# EAGLE board AS5040_Cuadrature (EAGLE 7.2.0)
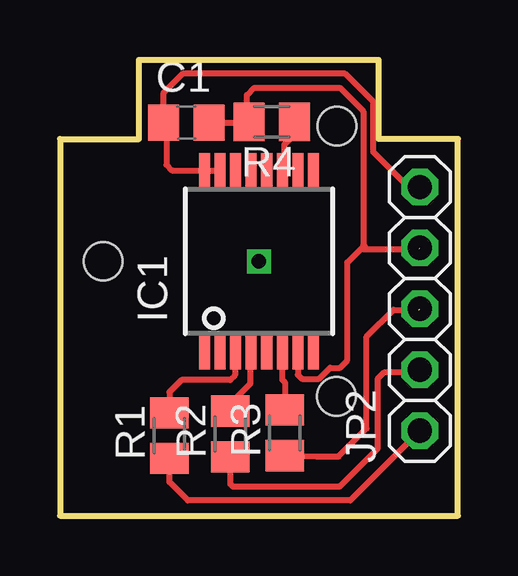
[diagram p0: board, top side]

Size 16.6 x 19 mm. Coordinates in mm from the lower left corner, seen from the top.
Outline: 0,15.7 3.3,15.7 3.3,19 13.3,19 13.3,15.7 16.6,15.7 16.6,0 0,0 0,15.7
Copper layers (1*16): Top 0.035mm / dielectric 1.5mm / Bottom 0.035mm
Design rules "default": minimum track width 10mil, minimum drill 24mil, track to track 8mil, track to pad 8mil, pad to pad 8mil, via to via 8mil, smd to smd 8mil, copper to edge 40mil, drill to drill 8mil, minimum pad ring 10mil, minimum via ring 8mil, stop-mask expansion 4mil, vias tented up to drill 0mil, thermal gap 10mil
Holes 1.6 mm at 1.8,10.61 11.56,16.24 11.54,4.97

## Footprints (pad centres in the part's own frame; a part is rotated, then mirrored left to right if it is on the bottom)
C0805 = smd 1.3 x 1.5: 1 -0.95,0; 2 0.95,0
SSOP16 = smd 0.46 x 1.43: 1 -2.275,-3.795; 2 -1.625,-3.795; 3 -0.975,-3.795; 4 -0.325,-3.795; 5 0.325,-3.795; 6 0.975,-3.795; 7 1.625,-3.795; 8 2.275,-3.795; 9 2.275,3.795; 10 1.625,3.795; 11 0.975,3.795; 12 0.325,3.795; 13 -0.325,3.795; 14 -0.975,3.795; 15 -1.625,3.795; 16 -2.275,3.795
1X05 = drill 1.016 octagon: 1 -5.08,0; 2 -2.54,0; 3 0,0; 4 2.54,0; 5 5.08,0
M0805 = smd 1.3 x 1.6: 1 -0.95,0; 2 0.95,0

## Placement (x,y rotation side)
C1  0,1  [C0805]  5.27,16.39 0 top
IC1  AS5040  [SSOP16]  8.3,10.6 0 top
JP2  [1X05]  15.01,8.62 90 top
R1  220  [M0805]  4.57,3.33 90 top
R2  220  [M0805]  7.1,3.4 90 top
R3  220  [M0805]  9.38,3.45 90 top
R4  3k  [M0805]  8.83,16.42 180 top

## Library data of the parts
C1 = rcl
IC1 = austriamicrosystems; MPN: AS5040ASSU; OC_FARNELL: 1630800; OC_NEWARK: 59P4059
JP2 = pinhead
R1-R4 = resistor

## Nets
A: JP2.1 R1.1
B: JP2.2 R2.1
GND: C1.2 IC1.7 JP2.4 R4.2
IND: JP2.3 R3.1
N$1: IC1.6 R3.2
N$2: IC1.3 R1.2
N$3: IC1.4 R2.2
N$4: IC1.11 R4.1
VDD: C1.1 IC1.15 IC1.16 JP2.5

## Tracks (layer width: path | path; a pad name or v marks a point on that pad's centre or on a via)
A
  Top 0.254: JP2.1 12.11,0.63 5.33,0.63 4.57,1.4 R1.1
B
  Top 0.254: JP2.2 14.89,5.96 13.51,5.96 13.25,5.7 13.25,2.78 11.67,1.2 7.22,1.2 7.11,1.31 R2.1
GND  (1 unrouted)
  Top 0.254: IC1.7 9.93,5.87 10.09,5.71 10.8,5.71 11.26,6.17 11.68,6.17 11.99,6.48 11.99,10.56 12.55,11.12 12.8,11.12 | 12.8,11.12 14.98,11.12 | C1.2 7.85,16.39 R4.2 7.79,16.51 7.79,17.53 8.1,17.84 11.67,17.84 12.65,16.86 12.65,11.27 12.8,11.12
IND  (1 unrouted)
  Top 0.254: R3.1 10.7,2.46 11.62,2.46 12.79,3.63 12.79,7.46 13.91,8.58 14.97,8.58
N$1
  Top 0.254: IC1.6 9.28,5.66 9.38,5.56 R3.2
N$2
  Top 0.254: IC1.3 7.3,6.78 7.3,5.84 7.1,5.65 5.07,5.65 4.57,5.15 R1.2
N$3
  Top 0.254: IC1.4 7.93,6.77 7.93,5.5 7.11,4.67 R2.2
N$4
  Top 0.254: R4.1 9.79,15.88 9.35,15.45 9.35,14.46 IC1.11
N$5  (via drill 0.6)
  other vias: 8.3,10.6
VDD
  Top 0.254: IC1.15 IC1.16 4.68,14.39 4.44,14.63 4.44,16.27 C1.1 4.31,16.4 4.31,17.61 5.12,18.42 11.9,18.42 13.05,17.28 13.05,15.18 14.54,13.7 JP2.5 14.87,13.7